# Altium PCB carrier_board.PcbDoc (part 2 of 18)
Units mm, origin at the board's own origin, x right, y up, seen from the top; angles counter-clockwise.
Board outline 146 x 102 mm, 20 copper layers (F.Cu, F.Mask, B.Cu, B.Mask, In1.Cu, F.SilkS, In2.Cu, B.SilkS, F.Adhes, B.Adhes, F.Paste, B.Paste, Dwgs.User, Cmts.User, Eco1.User, Eco2.User, Edge.Cuts, Margin, B.CrtYd, F.CrtYd); 256 components, 384 nets, 1262 pads, 1024 vias.
Unrouted connection lines stored in the file: 117.
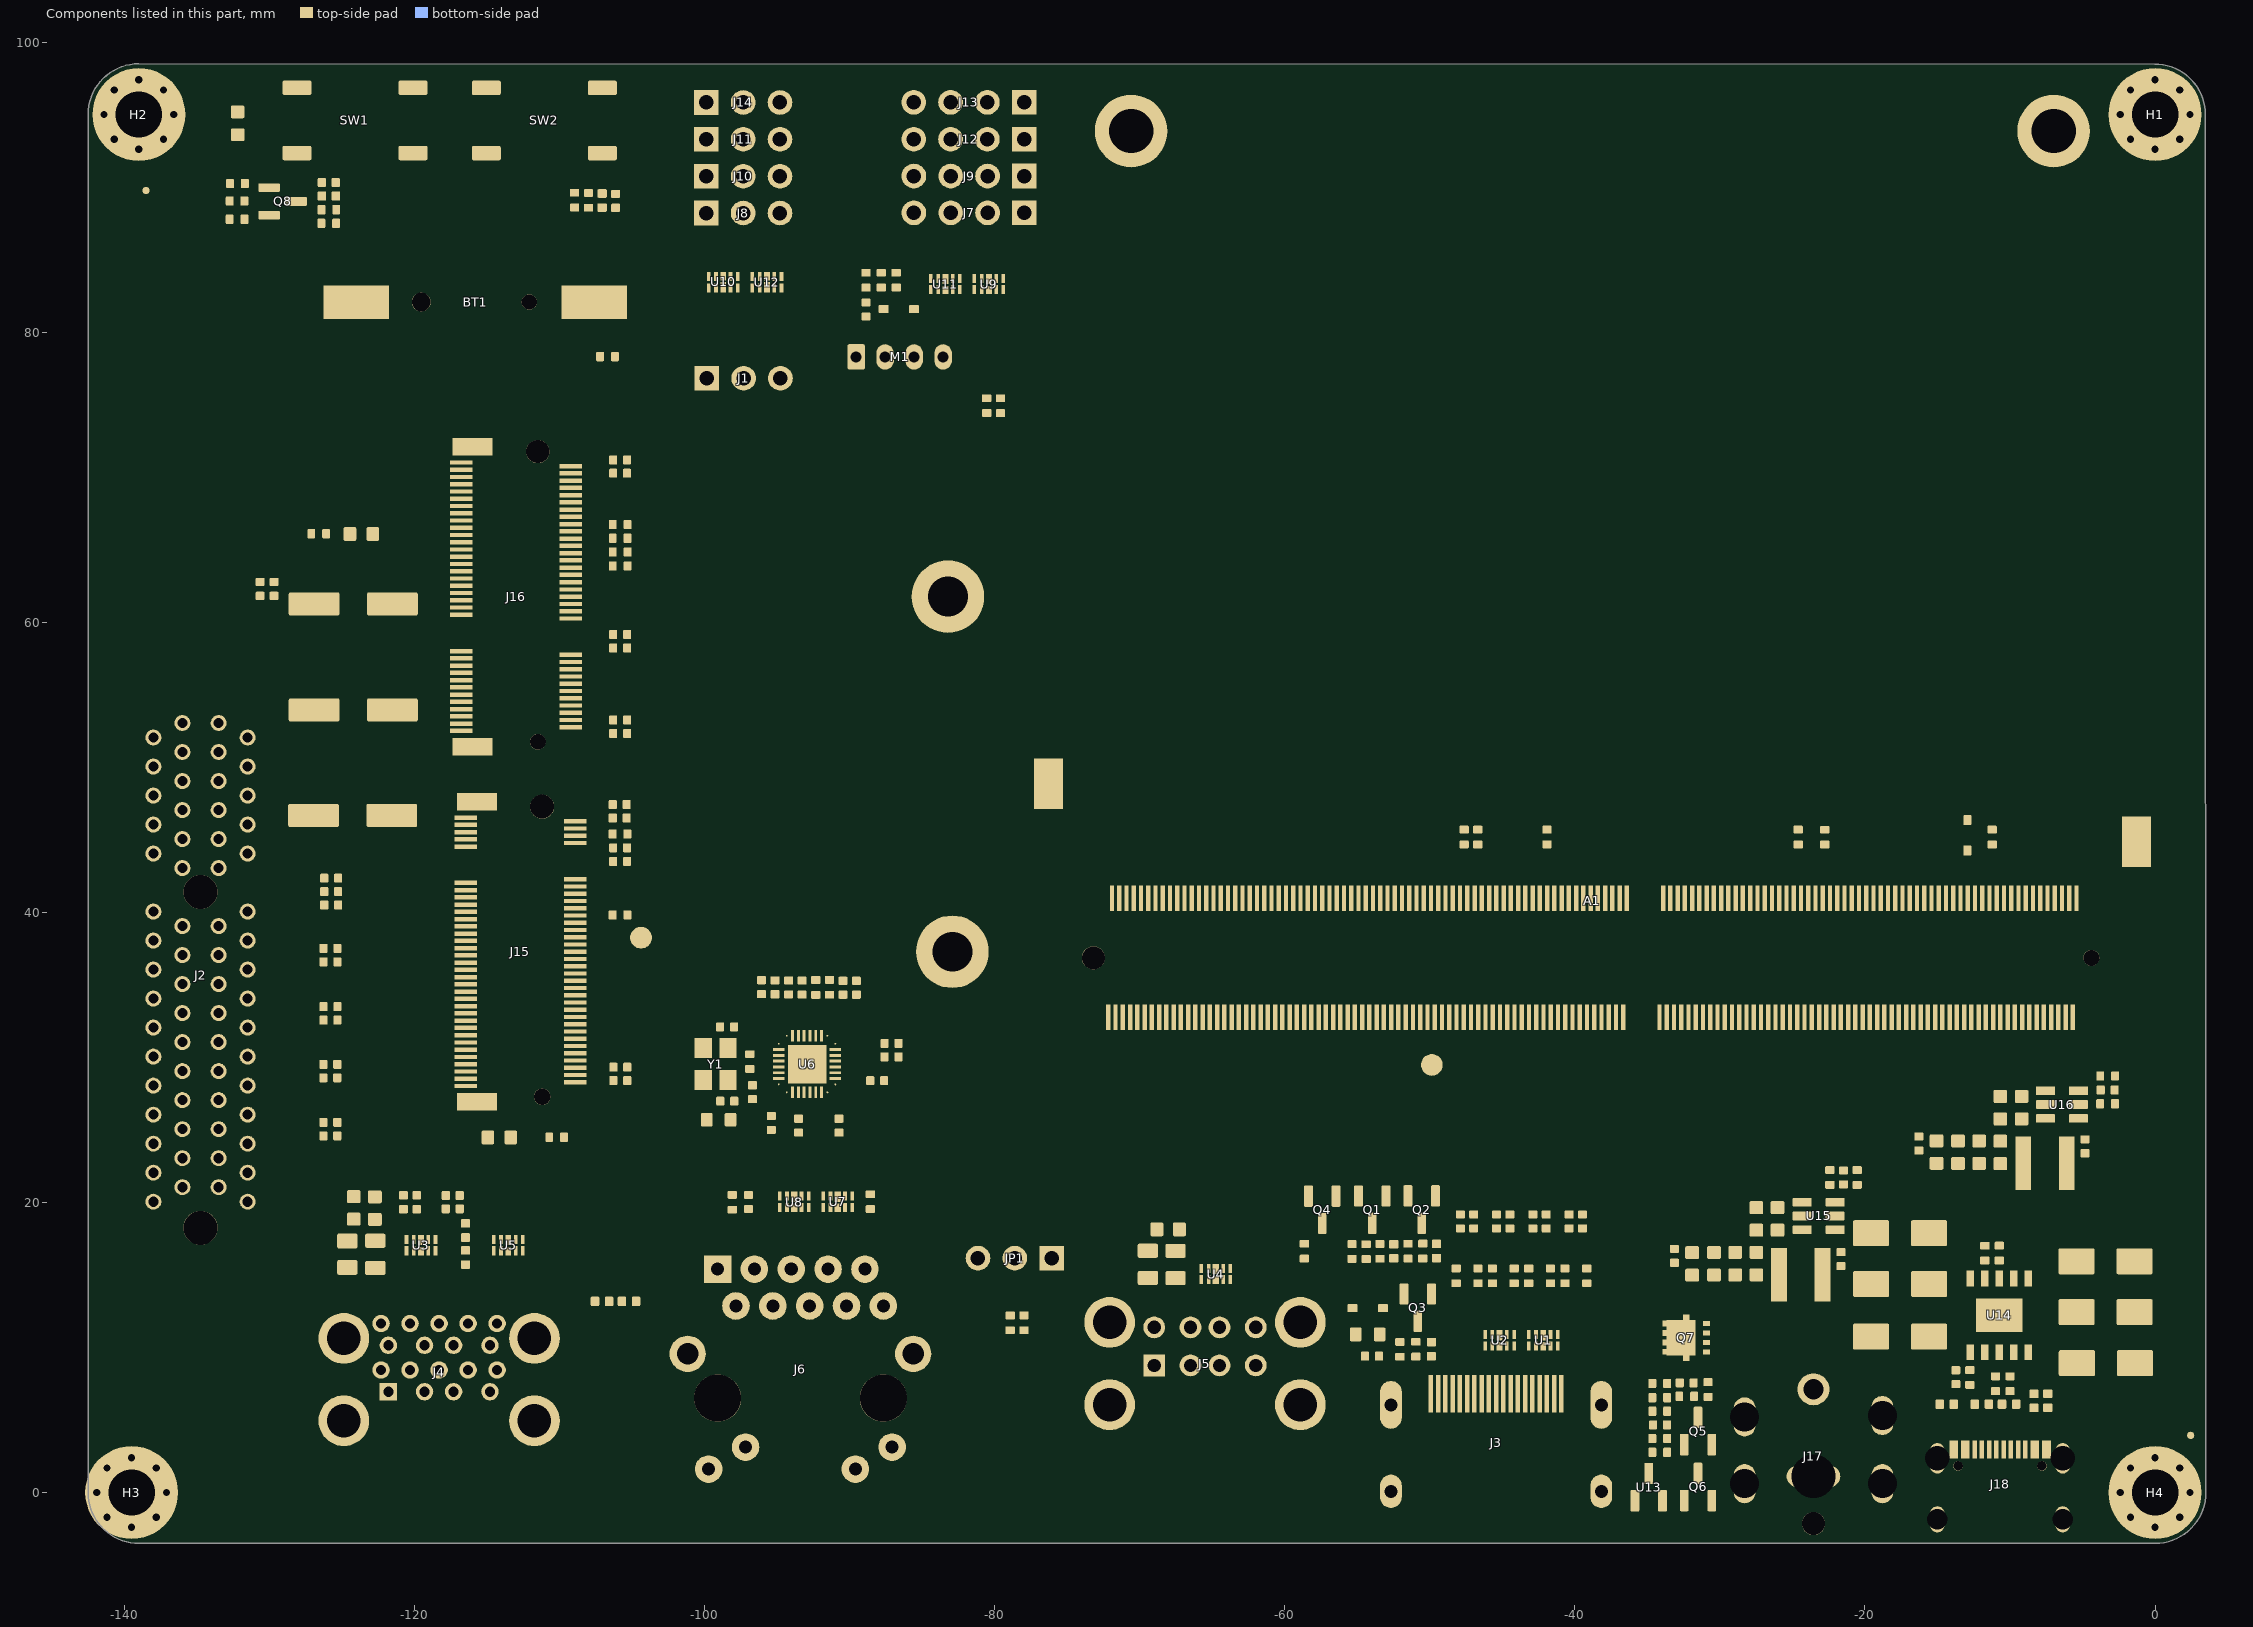
[diagram p13: the components of this part, seen from the top]

## Design rules (kind name [scope] priority, off if disabled: settings) (continued)
PolygonConnect Polygon_B.Cu-Net-(JP1-C)_ConnectDirect [IsNamedPolygon('B.Cu-Net-(JP1-C)')] p199: connectstyle=Direct reliefconductorwidth=0.254 reliefentries=4 polygonreliefangle="90 Angle" airgapwidth=0.254
PolygonConnect "Polygon_B.Cu-/LattePanda Module/HSIO_11_RX-_ConnectDirect" [IsNamedPolygon('B.Cu-/LattePanda Module/HSIO_11_RX-')] p200: connectstyle=Direct reliefconductorwidth=0.254 reliefentries=4 polygonreliefangle="90 Angle" airgapwidth=0.254
PolygonConnect "Polygon_B.Cu-/LattePanda Module/HSIO_2_RX+_ConnectDirect" [IsNamedPolygon('B.Cu-/LattePanda Module/HSIO_2_RX+')] p201: connectstyle=Direct reliefconductorwidth=0.254 reliefentries=4 polygonreliefangle="90 Angle" airgapwidth=0.254
PolygonConnect Polygon_B.Cu-/USB2.0&USB3.0/CON_USB3_D_P-1_ConnectDirect [IsNamedPolygon('B.Cu-/USB2.0&USB3.0/CON_USB3_D_P-1')] p202: connectstyle=Direct reliefconductorwidth=0.254 reliefentries=4 polygonreliefangle="90 Angle" airgapwidth=0.254
PolygonConnect "Polygon_B.Cu-/Gigabit Ethernet/GbE_PCIe_RX+_ConnectDirect" [IsNamedPolygon('B.Cu-/Gigabit Ethernet/GbE_PCIe_RX+')] p203: connectstyle=Direct reliefconductorwidth=0.254 reliefentries=4 polygonreliefangle="90 Angle" airgapwidth=0.254
PolygonConnect Polygon_B.Cu-Net-(Q7-G)_ConnectDirect [IsNamedPolygon('B.Cu-Net-(Q7-G)')] p204: connectstyle=Direct reliefconductorwidth=0.254 reliefentries=4 polygonreliefangle="90 Angle" airgapwidth=0.254
PolygonConnect Polygon_B.Cu-+15V-4_ConnectDirect [IsNamedPolygon('B.Cu-+15V-4')] p205: connectstyle=Direct reliefconductorwidth=0.254 reliefentries=4 polygonreliefangle="90 Angle" airgapwidth=0.254
PolygonConnect "Polygon_B.Cu-/LattePanda Module/HSIO_8_RX+_ConnectDirect" [IsNamedPolygon('B.Cu-/LattePanda Module/HSIO_8_RX+')] p206: connectstyle=Direct reliefconductorwidth=0.254 reliefentries=4 polygonreliefangle="90 Angle" airgapwidth=0.254
PolygonConnect "Polygon_B.Cu-/M.2 E&M Key/~{CLKREQE}-1_ConnectDirect" [IsNamedPolygon('B.Cu-/M.2 E&M Key/~{CLKREQE}-1')] p207: connectstyle=Direct reliefconductorwidth=0.254 reliefentries=4 polygonreliefangle="90 Angle" airgapwidth=0.254
PolygonConnect Polygon_B.Cu-/PSU/CC1_ConnectDirect [IsNamedPolygon('B.Cu-/PSU/CC1')] p208: connectstyle=Direct reliefconductorwidth=0.254 reliefentries=4 polygonreliefangle="90 Angle" airgapwidth=0.254
PolygonConnect "Polygon_B.Cu-/LattePanda Module/HSIO_9_TX+_ConnectDirect" [IsNamedPolygon('B.Cu-/LattePanda Module/HSIO_9_TX+')] p209: connectstyle=Direct reliefconductorwidth=0.254 reliefentries=4 polygonreliefangle="90 Angle" airgapwidth=0.254
PolygonConnect "Polygon_B.Cu-/LattePanda Module/HSIO_8_RX--1_ConnectDirect" [IsNamedPolygon('B.Cu-/LattePanda Module/HSIO_8_RX--1')] p210: connectstyle=Direct reliefconductorwidth=0.254 reliefentries=4 polygonreliefangle="90 Angle" airgapwidth=0.254
PolygonConnect Polygon_B.Cu-/USB2.0&USB3.0/CON_USB4_D_N_ConnectDirect [IsNamedPolygon('B.Cu-/USB2.0&USB3.0/CON_USB4_D_N')] p211: connectstyle=Direct reliefconductorwidth=0.254 reliefentries=4 polygonreliefangle="90 Angle" airgapwidth=0.254
PolygonConnect "Polygon_B.Cu-/LattePanda Module/USB_2_P7+_ConnectDirect" [IsNamedPolygon('B.Cu-/LattePanda Module/USB_2_P7+')] p212: connectstyle=Direct reliefconductorwidth=0.254 reliefentries=4 polygonreliefangle="90 Angle" airgapwidth=0.254
PolygonConnect Polygon_B.Cu-/USB2.0&USB3.0/CON_USB3_D_P_ConnectDirect [IsNamedPolygon('B.Cu-/USB2.0&USB3.0/CON_USB3_D_P')] p213: connectstyle=Direct reliefconductorwidth=0.254 reliefentries=4 polygonreliefangle="90 Angle" airgapwidth=0.254
PolygonConnect Polygon_B.Cu-VPullup_ConnectDirect [IsNamedPolygon('B.Cu-VPullup')] p214: connectstyle=Direct reliefconductorwidth=0.254 reliefentries=4 polygonreliefangle="90 Angle" airgapwidth=0.254
PolygonConnect Polygon_B.Cu-+15V-3_ConnectDirect [IsNamedPolygon('B.Cu-+15V-3')] p215: connectstyle=Direct reliefconductorwidth=0.254 reliefentries=4 polygonreliefangle="90 Angle" airgapwidth=0.254
PolygonConnect Polygon_B.Cu-+3V3-4_ConnectDirect [IsNamedPolygon('B.Cu-+3V3-4')] p216: connectstyle=Direct reliefconductorwidth=0.254 reliefentries=4 polygonreliefangle="90 Angle" airgapwidth=0.254
PolygonConnect "Polygon_B.Cu-/LattePanda Module/HSIO_8_TX+_ConnectDirect" [IsNamedPolygon('B.Cu-/LattePanda Module/HSIO_8_TX+')] p217: connectstyle=Direct reliefconductorwidth=0.254 reliefentries=4 polygonreliefangle="90 Angle" airgapwidth=0.254
PolygonConnect "Polygon_B.Cu-/Gigabit Ethernet/GbE_PCIe_CLK-_ConnectDirect" [IsNamedPolygon('B.Cu-/Gigabit Ethernet/GbE_PCIe_CLK-')] p218: connectstyle=Direct reliefconductorwidth=0.254 reliefentries=4 polygonreliefangle="90 Angle" airgapwidth=0.254
PolygonConnect Polygon_B.Cu-+15V-2_ConnectDirect [IsNamedPolygon('B.Cu-+15V-2')] p219: connectstyle=Direct reliefconductorwidth=0.254 reliefentries=4 polygonreliefangle="90 Angle" airgapwidth=0.254
PolygonConnect Polygon_B.Cu-/USB2.0&USB3.0/CON_USB3_SSRX_N_ConnectDirect [IsNamedPolygon('B.Cu-/USB2.0&USB3.0/CON_USB3_SSRX_N')] p220: connectstyle=Direct reliefconductorwidth=0.254 reliefentries=4 polygonreliefangle="90 Angle" airgapwidth=0.254
PolygonConnect Polygon_B.Cu-+15V-1_ConnectDirect [IsNamedPolygon('B.Cu-+15V-1')] p221: connectstyle=Direct reliefconductorwidth=0.254 reliefentries=4 polygonreliefangle="90 Angle" airgapwidth=0.254
PolygonConnect Polygon_B.Cu-/USB2.0&USB3.0/CON_USB3_D_N_ConnectDirect [IsNamedPolygon('B.Cu-/USB2.0&USB3.0/CON_USB3_D_N')] p222: connectstyle=Direct reliefconductorwidth=0.254 reliefentries=4 polygonreliefangle="90 Angle" airgapwidth=0.254
PolygonConnect "Polygon_B.Cu-/LattePanda Module/REFCLK2-_ConnectDirect" [IsNamedPolygon('B.Cu-/LattePanda Module/REFCLK2-')] p223: connectstyle=Direct reliefconductorwidth=0.254 reliefentries=4 polygonreliefangle="90 Angle" airgapwidth=0.254
PolygonConnect "Polygon_B.Cu-/LattePanda Module/HSIO_10_RX+_ConnectDirect" [IsNamedPolygon('B.Cu-/LattePanda Module/HSIO_10_RX+')] p224: connectstyle=Direct reliefconductorwidth=0.254 reliefentries=4 polygonreliefangle="90 Angle" airgapwidth=0.254
PolygonConnect "Polygon_B.Cu-/LattePanda Module/HSIO_11_TX+_ConnectDirect" [IsNamedPolygon('B.Cu-/LattePanda Module/HSIO_11_TX+')] p225: connectstyle=Direct reliefconductorwidth=0.254 reliefentries=4 polygonreliefangle="90 Angle" airgapwidth=0.254
PolygonConnect "Polygon_B.Cu-/Gigabit Ethernet/GbE_PCIe_CLK+_ConnectDirect" [IsNamedPolygon('B.Cu-/Gigabit Ethernet/GbE_PCIe_CLK+')] p226: connectstyle=Direct reliefconductorwidth=0.254 reliefentries=4 polygonreliefangle="90 Angle" airgapwidth=0.254
PolygonConnect Polygon_B.Cu-Net-(A1-SIO_UART_TX)_ConnectDirect [IsNamedPolygon('B.Cu-Net-(A1-SIO_UART_TX)')] p227: connectstyle=Direct reliefconductorwidth=0.254 reliefentries=4 polygonreliefangle="90 Angle" airgapwidth=0.254
PolygonConnect Polygon_B.Cu-+12V-1_ConnectDirect [IsNamedPolygon('B.Cu-+12V-1')] p228: connectstyle=Direct reliefconductorwidth=0.254 reliefentries=4 polygonreliefangle="90 Angle" airgapwidth=0.254
PolygonConnect Polygon_B.Cu-+15V_ConnectDirect [IsNamedPolygon('B.Cu-+15V')] p229: connectstyle=Direct reliefconductorwidth=0.254 reliefentries=4 polygonreliefangle="90 Angle" airgapwidth=0.254
PolygonConnect Polygon_B.Cu-+3V3-3_ConnectDirect [IsNamedPolygon('B.Cu-+3V3-3')] p230: connectstyle=Direct reliefconductorwidth=0.254 reliefentries=4 polygonreliefangle="90 Angle" airgapwidth=0.254
PolygonConnect Polygon_B.Cu-+3V3-2_ConnectDirect [IsNamedPolygon('B.Cu-+3V3-2')] p231: connectstyle=Direct reliefconductorwidth=0.254 reliefentries=4 polygonreliefangle="90 Angle" airgapwidth=0.254
PolygonConnect Polygon_B.Cu-+12V_ConnectDirect [IsNamedPolygon('B.Cu-+12V')] p232: connectstyle=Direct reliefconductorwidth=0.254 reliefentries=4 polygonreliefangle="90 Angle" airgapwidth=0.254
PolygonConnect Polygon_B.Cu-+BATT_ConnectDirect [IsNamedPolygon('B.Cu-+BATT')] p233: connectstyle=Direct reliefconductorwidth=0.254 reliefentries=4 polygonreliefangle="90 Angle" airgapwidth=0.254
PolygonConnect "Polygon_B.Cu-/LattePanda Module/HSIO_2_TX+_ConnectDirect" [IsNamedPolygon('B.Cu-/LattePanda Module/HSIO_2_TX+')] p234: connectstyle=Direct reliefconductorwidth=0.254 reliefentries=4 polygonreliefangle="90 Angle" airgapwidth=0.254
PolygonConnect "Polygon_B.Cu-/LattePanda Module/HSIO_3_TX+_ConnectDirect" [IsNamedPolygon('B.Cu-/LattePanda Module/HSIO_3_TX+')] p235: connectstyle=Direct reliefconductorwidth=0.254 reliefentries=4 polygonreliefangle="90 Angle" airgapwidth=0.254
PolygonConnect Polygon_B.Cu-+3V3-1_ConnectDirect [IsNamedPolygon('B.Cu-+3V3-1')] p236: connectstyle=Direct reliefconductorwidth=0.254 reliefentries=4 polygonreliefangle="90 Angle" airgapwidth=0.254
PolygonConnect Polygon_B.Cu-+3V3_ConnectDirect [IsNamedPolygon('B.Cu-+3V3')] p237: connectstyle=Direct reliefconductorwidth=0.254 reliefentries=4 polygonreliefangle="90 Angle" airgapwidth=0.254
PolygonConnect "Polygon_B.Cu-/LattePanda Module/HSIO_10_TX-_ConnectDirect" [IsNamedPolygon('B.Cu-/LattePanda Module/HSIO_10_TX-')] p238: connectstyle=Direct reliefconductorwidth=0.254 reliefentries=4 polygonreliefangle="90 Angle" airgapwidth=0.254
PolygonConnect Polygon_B.Cu-/GPIO/I2C2_SCL_ConnectDirect [IsNamedPolygon('B.Cu-/GPIO/I2C2_SCL')] p239: connectstyle=Direct reliefconductorwidth=0.254 reliefentries=4 polygonreliefangle="90 Angle" airgapwidth=0.254
PolygonConnect Polygon_B.Cu-/HDMI/DDI_B_HPD_ConnectDirect [IsNamedPolygon('B.Cu-/HDMI/DDI_B_HPD')] p240: connectstyle=Direct reliefconductorwidth=0.254 reliefentries=4 polygonreliefangle="90 Angle" airgapwidth=0.254
PolygonConnect Polygon_B.Cu-Net-(A1-~{BIOS_SEL})-1_ConnectDirect [IsNamedPolygon('B.Cu-Net-(A1-~{BIOS_SEL})-1')] p241: connectstyle=Direct reliefconductorwidth=0.254 reliefentries=4 polygonreliefangle="90 Angle" airgapwidth=0.254
PolygonConnect "Polygon_B.Cu-/LattePanda Module/HSIO_8_RX-_ConnectDirect" [IsNamedPolygon('B.Cu-/LattePanda Module/HSIO_8_RX-')] p242: connectstyle=Direct reliefconductorwidth=0.254 reliefentries=4 polygonreliefangle="90 Angle" airgapwidth=0.254
PolygonConnect "Polygon_B.Cu-/M.2 E&M Key/~{CLKREQE}_ConnectDirect" [IsNamedPolygon('B.Cu-/M.2 E&M Key/~{CLKREQE}')] p243: connectstyle=Direct reliefconductorwidth=0.254 reliefentries=4 polygonreliefangle="90 Angle" airgapwidth=0.254
PolygonConnect Polygon_B.Cu-/GPIO/I2C3_SCL_ConnectDirect [IsNamedPolygon('B.Cu-/GPIO/I2C3_SCL')] p244: connectstyle=Direct reliefconductorwidth=0.254 reliefentries=4 polygonreliefangle="90 Angle" airgapwidth=0.254
PolygonConnect Polygon_B.Cu-Net-(A1-~{BIOS_SEL})_ConnectDirect [IsNamedPolygon('B.Cu-Net-(A1-~{BIOS_SEL})')] p245: connectstyle=Direct reliefconductorwidth=0.254 reliefentries=4 polygonreliefangle="90 Angle" airgapwidth=0.254
PolygonConnect "Polygon_B.Cu-/LattePanda Module/HSIO_9_TX-_ConnectDirect" [IsNamedPolygon('B.Cu-/LattePanda Module/HSIO_9_TX-')] p246: connectstyle=Direct reliefconductorwidth=0.254 reliefentries=4 polygonreliefangle="90 Angle" airgapwidth=0.254
PolygonConnect Polygon_B.Cu-/PSU/CC2_ConnectDirect [IsNamedPolygon('B.Cu-/PSU/CC2')] p247: connectstyle=Direct reliefconductorwidth=0.254 reliefentries=4 polygonreliefangle="90 Angle" airgapwidth=0.254
PolygonConnect Polygon_In2.Cu-+3V3-1_ConnectDirect [IsNamedPolygon('In2.Cu-+3V3-1')] p248: connectstyle=Direct reliefconductorwidth=0.254 reliefentries=4 polygonreliefangle="90 Angle" airgapwidth=0.254
PolygonConnect Polygon_F.Cu-+3V3-79_ConnectDirect [IsNamedPolygon('F.Cu-+3V3-79')] p249: connectstyle=Direct reliefconductorwidth=0.254 reliefentries=4 polygonreliefangle="90 Angle" airgapwidth=0.254
PolygonConnect Polygon_In2.Cu-+3V3_ConnectDirect [IsNamedPolygon('In2.Cu-+3V3')] p250: connectstyle=Direct reliefconductorwidth=0.254 reliefentries=4 polygonreliefangle="90 Angle" airgapwidth=0.254
PolygonConnect Polygon_F.Cu-+3V3-78_ConnectDirect [IsNamedPolygon('F.Cu-+3V3-78')] p251: connectstyle=Direct reliefconductorwidth=0.254 reliefentries=4 polygonreliefangle="90 Angle" airgapwidth=0.254
PolygonConnect Polygon_B.Cu-+12VA_ConnectDirect [IsNamedPolygon('B.Cu-+12VA')] p252: connectstyle=Direct reliefconductorwidth=0.254 reliefentries=4 polygonreliefangle="90 Angle" airgapwidth=0.254
PolygonConnect Polygon_F.Cu-+12VA-2_ConnectDirect [IsNamedPolygon('F.Cu-+12VA-2')] p253: connectstyle=Direct reliefconductorwidth=0.254 reliefentries=4 polygonreliefangle="90 Angle" airgapwidth=0.254
PolygonConnect Polygon_B.Cu-GND-1_ConnectDirect [IsNamedPolygon('B.Cu-GND-1') vs IsVia or IsSMTPin] p254: connectstyle=Direct reliefconductorwidth=0.254 reliefentries=4 polygonreliefangle="90 Angle" airgapwidth=0.254
PolygonConnect Polygon_B.Cu-GND-1_ConnectRelief45 [IsNamedPolygon('B.Cu-GND-1') vs IsThruPin and (PadShape_AllLayers = 'Round')] p255: connectstyle=Relief reliefconductorwidth=0.3 reliefentries=4 polygonreliefangle="45 Angle" airgapwidth=0.3
PolygonConnect Polygon_B.Cu-GND-1_ConnectRelief90 [IsNamedPolygon('B.Cu-GND-1') vs IsThruPin and (PadShape_AllLayers <> 'Round')] p256: connectstyle=Relief reliefconductorwidth=0.3 reliefentries=4 polygonreliefangle="90 Angle" airgapwidth=0.3
PolygonConnect Polygon_F.Cu-GND-192_ConnectDirect [IsNamedPolygon('F.Cu-GND-192') vs IsVia or IsSMTPin] p257: connectstyle=Direct reliefconductorwidth=0.254 reliefentries=4 polygonreliefangle="90 Angle" airgapwidth=0.254
PolygonConnect Polygon_F.Cu-GND-192_ConnectRelief45 [IsNamedPolygon('F.Cu-GND-192') vs IsThruPin and (PadShape_AllLayers = 'Round')] p258: connectstyle=Relief reliefconductorwidth=0.3 reliefentries=4 polygonreliefangle="45 Angle" airgapwidth=0.3
PolygonConnect Polygon_F.Cu-GND-192_ConnectRelief90 [IsNamedPolygon('F.Cu-GND-192') vs IsThruPin and (PadShape_AllLayers <> 'Round')] p259: connectstyle=Relief reliefconductorwidth=0.3 reliefentries=4 polygonreliefangle="90 Angle" airgapwidth=0.3
PolygonConnect Polygon_B.Cu-+5V_ConnectDirect [IsNamedPolygon('B.Cu-+5V')] p260: connectstyle=Direct reliefconductorwidth=0.254 reliefentries=4 polygonreliefangle="90 Angle" airgapwidth=0.254
PolygonConnect Polygon_F.Cu-+5V-13_ConnectDirect [IsNamedPolygon('F.Cu-+5V-13')] p261: connectstyle=Direct reliefconductorwidth=0.254 reliefentries=4 polygonreliefangle="90 Angle" airgapwidth=0.254
PolygonConnect Polygon_B.Cu-GND_ConnectDirect [IsNamedPolygon('B.Cu-GND') vs IsVia or IsSMTPin] p262: connectstyle=Direct reliefconductorwidth=0.254 reliefentries=4 polygonreliefangle="90 Angle" airgapwidth=0.254
PolygonConnect Polygon_B.Cu-GND_ConnectRelief45 [IsNamedPolygon('B.Cu-GND') vs IsThruPin and (PadShape_AllLayers = 'Round')] p263: connectstyle=Relief reliefconductorwidth=0.5 reliefentries=4 polygonreliefangle="45 Angle" airgapwidth=0.5
PolygonConnect Polygon_B.Cu-GND_ConnectRelief90 [IsNamedPolygon('B.Cu-GND') vs IsThruPin and (PadShape_AllLayers <> 'Round')] p264: connectstyle=Relief reliefconductorwidth=0.5 reliefentries=4 polygonreliefangle="90 Angle" airgapwidth=0.5
PolygonConnect Polygon_F.Cu-GND-191_ConnectDirect [IsNamedPolygon('F.Cu-GND-191') vs IsVia or IsSMTPin] p265: connectstyle=Direct reliefconductorwidth=0.254 reliefentries=4 polygonreliefangle="90 Angle" airgapwidth=0.254
PolygonConnect Polygon_F.Cu-GND-191_ConnectRelief45 [IsNamedPolygon('F.Cu-GND-191') vs IsThruPin and (PadShape_AllLayers = 'Round')] p266: connectstyle=Relief reliefconductorwidth=0.5 reliefentries=4 polygonreliefangle="45 Angle" airgapwidth=0.5
PolygonConnect Polygon_F.Cu-GND-191_ConnectRelief90 [IsNamedPolygon('F.Cu-GND-191') vs IsThruPin and (PadShape_AllLayers <> 'Round')] p267: connectstyle=Relief reliefconductorwidth=0.5 reliefentries=4 polygonreliefangle="90 Angle" airgapwidth=0.5
PolygonConnect Polygon_F.Cu-/USB2.0&USB3.0/CON_USB1_D_N-4_ConnectDirect [IsNamedPolygon('F.Cu-/USB2.0&USB3.0/CON_USB1_D_N-4')] p268: connectstyle=Direct reliefconductorwidth=0.254 reliefentries=4 polygonreliefangle="90 Angle" airgapwidth=0.254
PolygonConnect Polygon_F.Cu-GND-190_ConnectDirect [IsNamedPolygon('F.Cu-GND-190')] p269: connectstyle=Direct reliefconductorwidth=0.254 reliefentries=4 polygonreliefangle="90 Angle" airgapwidth=0.254
PolygonConnect "Polygon_F.Cu-/LattePanda Module/HSIO_11_TX+-1_ConnectDirect" [IsNamedPolygon('F.Cu-/LattePanda Module/HSIO_11_TX+-1')] p270: connectstyle=Direct reliefconductorwidth=0.254 reliefentries=4 polygonreliefangle="90 Angle" airgapwidth=0.254
PolygonConnect "Polygon_F.Cu-/LattePanda Module/USB_2_P7+-2_ConnectDirect" [IsNamedPolygon('F.Cu-/LattePanda Module/USB_2_P7+-2')] p271: connectstyle=Direct reliefconductorwidth=0.254 reliefentries=4 polygonreliefangle="90 Angle" airgapwidth=0.254
PolygonConnect Polygon_F.Cu-Net-(U15-BOOST)-1_ConnectDirect [IsNamedPolygon('F.Cu-Net-(U15-BOOST)-1')] p272: connectstyle=Direct reliefconductorwidth=0.254 reliefentries=4 polygonreliefangle="90 Angle" airgapwidth=0.254
PolygonConnect Polygon_F.Cu-/GPIO/I2C4_SCL-4_ConnectDirect [IsNamedPolygon('F.Cu-/GPIO/I2C4_SCL-4')] p273: connectstyle=Direct reliefconductorwidth=0.254 reliefentries=4 polygonreliefangle="90 Angle" airgapwidth=0.254
PolygonConnect Polygon_F.Cu-Net-(D21-A2)-4_ConnectDirect [IsNamedPolygon('F.Cu-Net-(D21-A2)-4')] p274: connectstyle=Direct reliefconductorwidth=0.254 reliefentries=4 polygonreliefangle="90 Angle" airgapwidth=0.254
PolygonConnect Polygon_F.Cu-/Fan_Temp/FAN_1_PWM-2_ConnectDirect [IsNamedPolygon('F.Cu-/Fan_Temp/FAN_1_PWM-2')] p275: connectstyle=Direct reliefconductorwidth=0.254 reliefentries=4 polygonreliefangle="90 Angle" airgapwidth=0.254
PolygonConnect "Polygon_F.Cu-/Gigabit Ethernet/HSO+_ConnectDirect" [IsNamedPolygon('F.Cu-/Gigabit Ethernet/HSO+')] p276: connectstyle=Direct reliefconductorwidth=0.254 reliefentries=4 polygonreliefangle="90 Angle" airgapwidth=0.254
PolygonConnect Polygon_F.Cu-Net-(D26-A)-5_ConnectDirect [IsNamedPolygon('F.Cu-Net-(D26-A)-5')] p277: connectstyle=Direct reliefconductorwidth=0.254 reliefentries=4 polygonreliefangle="90 Angle" airgapwidth=0.254
PolygonConnect Polygon_F.Cu-/HDMI/DDC_SDA-3_ConnectDirect [IsNamedPolygon('F.Cu-/HDMI/DDC_SDA-3')] p278: connectstyle=Direct reliefconductorwidth=0.254 reliefentries=4 polygonreliefangle="90 Angle" airgapwidth=0.254
PolygonConnect Polygon_F.Cu-/GPIO/SOC_UART2_TX-4_ConnectDirect [IsNamedPolygon('F.Cu-/GPIO/SOC_UART2_TX-4')] p279: connectstyle=Direct reliefconductorwidth=0.254 reliefentries=4 polygonreliefangle="90 Angle" airgapwidth=0.254
PolygonConnect Polygon_F.Cu-Net-(Q5-G)-3_ConnectDirect [IsNamedPolygon('F.Cu-Net-(Q5-G)-3')] p280: connectstyle=Direct reliefconductorwidth=0.254 reliefentries=4 polygonreliefangle="90 Angle" airgapwidth=0.254
PolygonConnect Polygon_F.Cu-/USB2.0&USB3.0/CON_USB2_D_P-4_ConnectDirect [IsNamedPolygon('F.Cu-/USB2.0&USB3.0/CON_USB2_D_P-4')] p281: connectstyle=Direct reliefconductorwidth=0.254 reliefentries=4 polygonreliefangle="90 Angle" airgapwidth=0.254
PolygonConnect Polygon_F.Cu-/GPIO/I2C3_SCL-6_ConnectDirect [IsNamedPolygon('F.Cu-/GPIO/I2C3_SCL-6')] p282: connectstyle=Direct reliefconductorwidth=0.254 reliefentries=4 polygonreliefangle="90 Angle" airgapwidth=0.254
PolygonConnect Polygon_F.Cu-/HDMI/DDC_SCL-6_ConnectDirect [IsNamedPolygon('F.Cu-/HDMI/DDC_SCL-6')] p283: connectstyle=Direct reliefconductorwidth=0.254 reliefentries=4 polygonreliefangle="90 Angle" airgapwidth=0.254
PolygonConnect Polygon_F.Cu-+15V-5_ConnectDirect [IsNamedPolygon('F.Cu-+15V-5')] p284: connectstyle=Direct reliefconductorwidth=0.254 reliefentries=4 polygonreliefangle="90 Angle" airgapwidth=0.254
PolygonConnect Polygon_F.Cu-+15V-4_ConnectDirect [IsNamedPolygon('F.Cu-+15V-4')] p285: connectstyle=Direct reliefconductorwidth=0.254 reliefentries=4 polygonreliefangle="90 Angle" airgapwidth=0.254
PolygonConnect Polygon_F.Cu-GND-189_ConnectDirect [IsNamedPolygon('F.Cu-GND-189')] p286: connectstyle=Direct reliefconductorwidth=0.254 reliefentries=4 polygonreliefangle="90 Angle" airgapwidth=0.254
PolygonConnect Polygon_F.Cu-Net-(D9-K)-1_ConnectDirect [IsNamedPolygon('F.Cu-Net-(D9-K)-1')] p287: connectstyle=Direct reliefconductorwidth=0.254 reliefentries=4 polygonreliefangle="90 Angle" airgapwidth=0.254
PolygonConnect Polygon_F.Cu-/HDMI/DDC_SDA-2_ConnectDirect [IsNamedPolygon('F.Cu-/HDMI/DDC_SDA-2')] p288: connectstyle=Direct reliefconductorwidth=0.254 reliefentries=4 polygonreliefangle="90 Angle" airgapwidth=0.254
PolygonConnect Polygon_F.Cu-GND-188_ConnectDirect [IsNamedPolygon('F.Cu-GND-188')] p289: connectstyle=Direct reliefconductorwidth=0.254 reliefentries=4 polygonreliefangle="90 Angle" airgapwidth=0.254
PolygonConnect Polygon_F.Cu-GND-187_ConnectDirect [IsNamedPolygon('F.Cu-GND-187')] p290: connectstyle=Direct reliefconductorwidth=0.254 reliefentries=4 polygonreliefangle="90 Angle" airgapwidth=0.254
PolygonConnect Polygon_F.Cu-/HDMI/TMDS_CK+-7_ConnectDirect [IsNamedPolygon('F.Cu-/HDMI/TMDS_CK+-7')] p291: connectstyle=Direct reliefconductorwidth=0.254 reliefentries=4 polygonreliefangle="90 Angle" airgapwidth=0.254
PolygonConnect Polygon_F.Cu-/USB2.0&USB3.0/CON_USB4_SSTX_N-5_ConnectDirect [IsNamedPolygon('F.Cu-/USB2.0&USB3.0/CON_USB4_SSTX_N-5')] p292: connectstyle=Direct reliefconductorwidth=0.254 reliefentries=4 polygonreliefangle="90 Angle" airgapwidth=0.254
PolygonConnect Polygon_F.Cu-GND-186_ConnectDirect [IsNamedPolygon('F.Cu-GND-186')] p293: connectstyle=Direct reliefconductorwidth=0.254 reliefentries=4 polygonreliefangle="90 Angle" airgapwidth=0.254
PolygonConnect Polygon_F.Cu-Net-(U6-CKXTAL1)-5_ConnectDirect [IsNamedPolygon('F.Cu-Net-(U6-CKXTAL1)-5')] p294: connectstyle=Direct reliefconductorwidth=0.254 reliefentries=4 polygonreliefangle="90 Angle" airgapwidth=0.254
PolygonConnect Polygon_F.Cu-/GPIO/I2C5_SCL-4_ConnectDirect [IsNamedPolygon('F.Cu-/GPIO/I2C5_SCL-4')] p295: connectstyle=Direct reliefconductorwidth=0.254 reliefentries=4 polygonreliefangle="90 Angle" airgapwidth=0.254
PolygonConnect Polygon_F.Cu-/GPIO/SOC_UART0_TX-4_ConnectDirect [IsNamedPolygon('F.Cu-/GPIO/SOC_UART0_TX-4')] p296: connectstyle=Direct reliefconductorwidth=0.254 reliefentries=4 polygonreliefangle="90 Angle" airgapwidth=0.254
PolygonConnect Polygon_F.Cu-/USB2.0&USB3.0/CON_USB1_D_N-3_ConnectDirect [IsNamedPolygon('F.Cu-/USB2.0&USB3.0/CON_USB1_D_N-3')] p297: connectstyle=Direct reliefconductorwidth=0.254 reliefentries=4 polygonreliefangle="90 Angle" airgapwidth=0.254
PolygonConnect "Polygon_F.Cu-/LattePanda Module/HSIO_3_TX+-2_ConnectDirect" [IsNamedPolygon('F.Cu-/LattePanda Module/HSIO_3_TX+-2')] p298: connectstyle=Direct reliefconductorwidth=0.254 reliefentries=4 polygonreliefangle="90 Angle" airgapwidth=0.254
PolygonConnect Polygon_F.Cu-GND-185_ConnectDirect [IsNamedPolygon('F.Cu-GND-185')] p299: connectstyle=Direct reliefconductorwidth=0.254 reliefentries=4 polygonreliefangle="90 Angle" airgapwidth=0.254
PolygonConnect Polygon_F.Cu-/HDMI/TMDS_D2+-7_ConnectDirect [IsNamedPolygon('F.Cu-/HDMI/TMDS_D2+-7')] p300: connectstyle=Direct reliefconductorwidth=0.254 reliefentries=4 polygonreliefangle="90 Angle" airgapwidth=0.254
PolygonConnect Polygon_F.Cu-Net-(D11-A2)-3_ConnectDirect [IsNamedPolygon('F.Cu-Net-(D11-A2)-3')] p301: connectstyle=Direct reliefconductorwidth=0.254 reliefentries=4 polygonreliefangle="90 Angle" airgapwidth=0.254
PolygonConnect Polygon_F.Cu-Net-(Q4-D)-8_ConnectDirect [IsNamedPolygon('F.Cu-Net-(Q4-D)-8')] p302: connectstyle=Direct reliefconductorwidth=0.254 reliefentries=4 polygonreliefangle="90 Angle" airgapwidth=0.254
PolygonConnect "Polygon_F.Cu-/Gigabit Ethernet/MDI2+-1_ConnectDirect" [IsNamedPolygon('F.Cu-/Gigabit Ethernet/MDI2+-1')] p303: connectstyle=Direct reliefconductorwidth=0.254 reliefentries=4 polygonreliefangle="90 Angle" airgapwidth=0.254
PolygonConnect Polygon_F.Cu-/~{PWR_LED}{slash}~{PSON}-5_ConnectDirect [IsNamedPolygon('F.Cu-/~{PWR_LED}{slash}~{PSON}-5')] p304: connectstyle=Direct reliefconductorwidth=0.254 reliefentries=4 polygonreliefangle="90 Angle" airgapwidth=0.254
PolygonConnect Polygon_F.Cu-+3V3-77_ConnectDirect [IsNamedPolygon('F.Cu-+3V3-77')] p305: connectstyle=Direct reliefconductorwidth=0.254 reliefentries=4 polygonreliefangle="90 Angle" airgapwidth=0.254
PolygonConnect Polygon_F.Cu-+5V-12_ConnectDirect [IsNamedPolygon('F.Cu-+5V-12')] p306: connectstyle=Direct reliefconductorwidth=0.254 reliefentries=4 polygonreliefangle="90 Angle" airgapwidth=0.254
PolygonConnect Polygon_F.Cu-/GPIO/SOC_UART2_TX-3_ConnectDirect [IsNamedPolygon('F.Cu-/GPIO/SOC_UART2_TX-3')] p307: connectstyle=Direct reliefconductorwidth=0.254 reliefentries=4 polygonreliefangle="90 Angle" airgapwidth=0.254
PolygonConnect Polygon_F.Cu-+3V3-76_ConnectDirect [IsNamedPolygon('F.Cu-+3V3-76')] p308: connectstyle=Direct reliefconductorwidth=0.254 reliefentries=4 polygonreliefangle="90 Angle" airgapwidth=0.254
PolygonConnect Polygon_F.Cu-+3V3-75_ConnectDirect [IsNamedPolygon('F.Cu-+3V3-75')] p309: connectstyle=Direct reliefconductorwidth=0.254 reliefentries=4 polygonreliefangle="90 Angle" airgapwidth=0.254
PolygonConnect Polygon_F.Cu-GND-184_ConnectDirect [IsNamedPolygon('F.Cu-GND-184')] p310: connectstyle=Direct reliefconductorwidth=0.254 reliefentries=4 polygonreliefangle="90 Angle" airgapwidth=0.254
PolygonConnect Polygon_F.Cu-VPullup-7_ConnectDirect [IsNamedPolygon('F.Cu-VPullup-7')] p311: connectstyle=Direct reliefconductorwidth=0.254 reliefentries=4 polygonreliefangle="90 Angle" airgapwidth=0.254
PolygonConnect Polygon_F.Cu-/USB2.0&USB3.0/CON_USB3_SSRX_N-4_ConnectDirect [IsNamedPolygon('F.Cu-/USB2.0&USB3.0/CON_USB3_SSRX_N-4')] p312: connectstyle=Direct reliefconductorwidth=0.254 reliefentries=4 polygonreliefangle="90 Angle" airgapwidth=0.254
PolygonConnect Polygon_F.Cu-GND-183_ConnectDirect [IsNamedPolygon('F.Cu-GND-183')] p313: connectstyle=Direct reliefconductorwidth=0.254 reliefentries=4 polygonreliefangle="90 Angle" airgapwidth=0.254
PolygonConnect "Polygon_F.Cu-/Gigabit Ethernet/LED2_ACT_ConnectDirect" [IsNamedPolygon('F.Cu-/Gigabit Ethernet/LED2_ACT')] p314: connectstyle=Direct reliefconductorwidth=0.254 reliefentries=4 polygonreliefangle="90 Angle" airgapwidth=0.254
PolygonConnect Polygon_F.Cu-+3V3-74_ConnectDirect [IsNamedPolygon('F.Cu-+3V3-74')] p315: connectstyle=Direct reliefconductorwidth=0.254 reliefentries=4 polygonreliefangle="90 Angle" airgapwidth=0.254
PolygonConnect "Polygon_F.Cu-/LattePanda Module/REFCLK2--2_ConnectDirect" [IsNamedPolygon('F.Cu-/LattePanda Module/REFCLK2--2')] p316: connectstyle=Direct reliefconductorwidth=0.254 reliefentries=4 polygonreliefangle="90 Angle" airgapwidth=0.254
PolygonConnect Polygon_F.Cu-+12VA-1_ConnectDirect [IsNamedPolygon('F.Cu-+12VA-1')] p317: connectstyle=Direct reliefconductorwidth=0.254 reliefentries=4 polygonreliefangle="90 Angle" airgapwidth=0.254
PolygonConnect Polygon_F.Cu-GND-182_ConnectDirect [IsNamedPolygon('F.Cu-GND-182')] p318: connectstyle=Direct reliefconductorwidth=0.254 reliefentries=4 polygonreliefangle="90 Angle" airgapwidth=0.254
PolygonConnect Polygon_F.Cu-GND-181_ConnectDirect [IsNamedPolygon('F.Cu-GND-181')] p319: connectstyle=Direct reliefconductorwidth=0.254 reliefentries=4 polygonreliefangle="90 Angle" airgapwidth=0.254
PolygonConnect Polygon_F.Cu-Net-(D11-A2)-2_ConnectDirect [IsNamedPolygon('F.Cu-Net-(D11-A2)-2')] p320: connectstyle=Direct reliefconductorwidth=0.254 reliefentries=4 polygonreliefangle="90 Angle" airgapwidth=0.254
PolygonConnect Polygon_F.Cu-/USB2.0&USB3.0/CON_USB3_SSTX_N-5_ConnectDirect [IsNamedPolygon('F.Cu-/USB2.0&USB3.0/CON_USB3_SSTX_N-5')] p321: connectstyle=Direct reliefconductorwidth=0.254 reliefentries=4 polygonreliefangle="90 Angle" airgapwidth=0.254
PolygonConnect Polygon_F.Cu-GND-180_ConnectDirect [IsNamedPolygon('F.Cu-GND-180')] p322: connectstyle=Direct reliefconductorwidth=0.254 reliefentries=4 polygonreliefangle="90 Angle" airgapwidth=0.254
PolygonConnect Polygon_F.Cu-/HDMI/HPD-5_ConnectDirect [IsNamedPolygon('F.Cu-/HDMI/HPD-5')] p323: connectstyle=Direct reliefconductorwidth=0.254 reliefentries=4 polygonreliefangle="90 Angle" airgapwidth=0.254
PolygonConnect Polygon_F.Cu-/USB2.0&USB3.0/CON_USB3_D_N-4_ConnectDirect [IsNamedPolygon('F.Cu-/USB2.0&USB3.0/CON_USB3_D_N-4')] p324: connectstyle=Direct reliefconductorwidth=0.254 reliefentries=4 polygonreliefangle="90 Angle" airgapwidth=0.254
PolygonConnect "Polygon_F.Cu-/Gigabit Ethernet/GbE_PCIe_RX+-2_ConnectDirect" [IsNamedPolygon('F.Cu-/Gigabit Ethernet/GbE_PCIe_RX+-2')] p325: connectstyle=Direct reliefconductorwidth=0.254 reliefentries=4 polygonreliefangle="90 Angle" airgapwidth=0.254
PolygonConnect Polygon_F.Cu-GND-179_ConnectDirect [IsNamedPolygon('F.Cu-GND-179')] p326: connectstyle=Direct reliefconductorwidth=0.254 reliefentries=4 polygonreliefangle="90 Angle" airgapwidth=0.254
PolygonConnect "Polygon_F.Cu-/LattePanda Module/HSIO_1_TX--2_ConnectDirect" [IsNamedPolygon('F.Cu-/LattePanda Module/HSIO_1_TX--2')] p327: connectstyle=Direct reliefconductorwidth=0.254 reliefentries=4 polygonreliefangle="90 Angle" airgapwidth=0.254
PolygonConnect Polygon_F.Cu-/USB2.0&USB3.0/CON_USB3_SSTX_P-5_ConnectDirect [IsNamedPolygon('F.Cu-/USB2.0&USB3.0/CON_USB3_SSTX_P-5')] p328: connectstyle=Direct reliefconductorwidth=0.254 reliefentries=4 polygonreliefangle="90 Angle" airgapwidth=0.254
PolygonConnect Polygon_F.Cu-Net-(U14-VDD)-3_ConnectDirect [IsNamedPolygon('F.Cu-Net-(U14-VDD)-3')] p329: connectstyle=Direct reliefconductorwidth=0.254 reliefentries=4 polygonreliefangle="90 Angle" airgapwidth=0.254
PolygonConnect Polygon_F.Cu-/HDMI/TMDS_D0--7_ConnectDirect [IsNamedPolygon('F.Cu-/HDMI/TMDS_D0--7')] p330: connectstyle=Direct reliefconductorwidth=0.254 reliefentries=4 polygonreliefangle="90 Angle" airgapwidth=0.254
PolygonConnect Polygon_F.Cu-GND-178_ConnectDirect [IsNamedPolygon('F.Cu-GND-178')] p331: connectstyle=Direct reliefconductorwidth=0.254 reliefentries=4 polygonreliefangle="90 Angle" airgapwidth=0.254
PolygonConnect "Polygon_F.Cu-/LattePanda Module/HSIO_8_TX+-2_ConnectDirect" [IsNamedPolygon('F.Cu-/LattePanda Module/HSIO_8_TX+-2')] p332: connectstyle=Direct reliefconductorwidth=0.254 reliefentries=4 polygonreliefangle="90 Angle" airgapwidth=0.254
PolygonConnect Polygon_F.Cu-/HDMI/TMDS_CK--7_ConnectDirect [IsNamedPolygon('F.Cu-/HDMI/TMDS_CK--7')] p333: connectstyle=Direct reliefconductorwidth=0.254 reliefentries=4 polygonreliefangle="90 Angle" airgapwidth=0.254
PolygonConnect Polygon_F.Cu-GND-177_ConnectDirect [IsNamedPolygon('F.Cu-GND-177')] p334: connectstyle=Direct reliefconductorwidth=0.254 reliefentries=4 polygonreliefangle="90 Angle" airgapwidth=0.254
PolygonConnect Polygon_F.Cu-Net-(U13-REF)-3_ConnectDirect [IsNamedPolygon('F.Cu-Net-(U13-REF)-3')] p335: connectstyle=Direct reliefconductorwidth=0.254 reliefentries=4 polygonreliefangle="90 Angle" airgapwidth=0.254
PolygonConnect Polygon_F.Cu-Net-(U10-NC-Pad6)-1_ConnectDirect [IsNamedPolygon('F.Cu-Net-(U10-NC-Pad6)-1')] p336: connectstyle=Direct reliefconductorwidth=0.254 reliefentries=4 polygonreliefangle="90 Angle" airgapwidth=0.254
PolygonConnect Polygon_F.Cu-GND-176_ConnectDirect [IsNamedPolygon('F.Cu-GND-176')] p337: connectstyle=Direct reliefconductorwidth=0.254 reliefentries=4 polygonreliefangle="90 Angle" airgapwidth=0.254
PolygonConnect Polygon_F.Cu-+12V-10_ConnectDirect [IsNamedPolygon('F.Cu-+12V-10')] p338: connectstyle=Direct reliefconductorwidth=0.254 reliefentries=4 polygonreliefangle="90 Angle" airgapwidth=0.254
PolygonConnect Polygon_F.Cu-GND-175_ConnectDirect [IsNamedPolygon('F.Cu-GND-175')] p339: connectstyle=Direct reliefconductorwidth=0.254 reliefentries=4 polygonreliefangle="90 Angle" airgapwidth=0.254
PolygonConnect Polygon_F.Cu-/PSU/PWR_EN-9_ConnectDirect [IsNamedPolygon('F.Cu-/PSU/PWR_EN-9')] p340: connectstyle=Direct reliefconductorwidth=0.254 reliefentries=4 polygonreliefangle="90 Angle" airgapwidth=0.254
PolygonConnect Polygon_F.Cu-/HDMI/HPD-4_ConnectDirect [IsNamedPolygon('F.Cu-/HDMI/HPD-4')] p341: connectstyle=Direct reliefconductorwidth=0.254 reliefentries=4 polygonreliefangle="90 Angle" airgapwidth=0.254
PolygonConnect Polygon_F.Cu-/GPIO/SOC_UART2_RX-4_ConnectDirect [IsNamedPolygon('F.Cu-/GPIO/SOC_UART2_RX-4')] p342: connectstyle=Direct reliefconductorwidth=0.254 reliefentries=4 polygonreliefangle="90 Angle" airgapwidth=0.254
PolygonConnect Polygon_F.Cu-+12V-9_ConnectDirect [IsNamedPolygon('F.Cu-+12V-9')] p343: connectstyle=Direct reliefconductorwidth=0.254 reliefentries=4 polygonreliefangle="90 Angle" airgapwidth=0.254
PolygonConnect Polygon_F.Cu-/GPIO/SOC_UART2_TX-2_ConnectDirect [IsNamedPolygon('F.Cu-/GPIO/SOC_UART2_TX-2')] p344: connectstyle=Direct reliefconductorwidth=0.254 reliefentries=4 polygonreliefangle="90 Angle" airgapwidth=0.254
PolygonConnect Polygon_F.Cu-/GPIO/I2C5_SCL-3_ConnectDirect [IsNamedPolygon('F.Cu-/GPIO/I2C5_SCL-3')] p345: connectstyle=Direct reliefconductorwidth=0.254 reliefentries=4 polygonreliefangle="90 Angle" airgapwidth=0.254
PolygonConnect Polygon_F.Cu-VDC-3_ConnectDirect [IsNamedPolygon('F.Cu-VDC-3')] p346: connectstyle=Direct reliefconductorwidth=0.254 reliefentries=4 polygonreliefangle="90 Angle" airgapwidth=0.254
PolygonConnect Polygon_F.Cu-/USB2.0&USB3.0/CON_USB4_SSRX_P-4_ConnectDirect [IsNamedPolygon('F.Cu-/USB2.0&USB3.0/CON_USB4_SSRX_P-4')] p347: connectstyle=Direct reliefconductorwidth=0.254 reliefentries=4 polygonreliefangle="90 Angle" airgapwidth=0.254
PolygonConnect Polygon_F.Cu-Net-(U6-RSET)-1_ConnectDirect [IsNamedPolygon('F.Cu-Net-(U6-RSET)-1')] p348: connectstyle=Direct reliefconductorwidth=0.254 reliefentries=4 polygonreliefangle="90 Angle" airgapwidth=0.254
PolygonConnect "Polygon_F.Cu-/LattePanda Module/USB_2_P7--2_ConnectDirect" [IsNamedPolygon('F.Cu-/LattePanda Module/USB_2_P7--2')] p349: connectstyle=Direct reliefconductorwidth=0.254 reliefentries=4 polygonreliefangle="90 Angle" airgapwidth=0.254
PolygonConnect "Polygon_F.Cu-/LattePanda Module/HSIO_2_RX--2_ConnectDirect" [IsNamedPolygon('F.Cu-/LattePanda Module/HSIO_2_RX--2')] p350: connectstyle=Direct reliefconductorwidth=0.254 reliefentries=4 polygonreliefangle="90 Angle" airgapwidth=0.254
PolygonConnect Polygon_F.Cu-+3V3-73_ConnectDirect [IsNamedPolygon('F.Cu-+3V3-73')] p351: connectstyle=Direct reliefconductorwidth=0.254 reliefentries=4 polygonreliefangle="90 Angle" airgapwidth=0.254
PolygonConnect Polygon_F.Cu-/USB2.0&USB3.0/CON_USB4_SSTX_P-5_ConnectDirect [IsNamedPolygon('F.Cu-/USB2.0&USB3.0/CON_USB4_SSTX_P-5')] p352: connectstyle=Direct reliefconductorwidth=0.254 reliefentries=4 polygonreliefangle="90 Angle" airgapwidth=0.254
PolygonConnect Polygon_F.Cu-/USB2.0&USB3.0/CON_USB3_SSTX_N-4_ConnectDirect [IsNamedPolygon('F.Cu-/USB2.0&USB3.0/CON_USB3_SSTX_N-4')] p353: connectstyle=Direct reliefconductorwidth=0.254 reliefentries=4 polygonreliefangle="90 Angle" airgapwidth=0.254
PolygonConnect Polygon_F.Cu-/USB2.0&USB3.0/CON_USB2_D_N-4_ConnectDirect [IsNamedPolygon('F.Cu-/USB2.0&USB3.0/CON_USB2_D_N-4')] p354: connectstyle=Direct reliefconductorwidth=0.254 reliefentries=4 polygonreliefangle="90 Angle" airgapwidth=0.254
PolygonConnect Polygon_F.Cu-Net-(Q8-G)-3_ConnectDirect [IsNamedPolygon('F.Cu-Net-(Q8-G)-3')] p355: connectstyle=Direct reliefconductorwidth=0.254 reliefentries=4 polygonreliefangle="90 Angle" airgapwidth=0.254
PolygonConnect Polygon_F.Cu-/HDMI/DDI_B_DDC_SCL-2_ConnectDirect [IsNamedPolygon('F.Cu-/HDMI/DDI_B_DDC_SCL-2')] p356: connectstyle=Direct reliefconductorwidth=0.254 reliefentries=4 polygonreliefangle="90 Angle" airgapwidth=0.254
PolygonConnect Polygon_F.Cu-/HDMI/DDI_B_TX3+_ConnectDirect [IsNamedPolygon('F.Cu-/HDMI/DDI_B_TX3+')] p357: connectstyle=Direct reliefconductorwidth=0.254 reliefentries=4 polygonreliefangle="90 Angle" airgapwidth=0.254
PolygonConnect Polygon_F.Cu-/PSU/PWR_EN-8_ConnectDirect [IsNamedPolygon('F.Cu-/PSU/PWR_EN-8')] p358: connectstyle=Direct reliefconductorwidth=0.254 reliefentries=4 polygonreliefangle="90 Angle" airgapwidth=0.254
PolygonConnect Polygon_F.Cu-GND-174_ConnectDirect [IsNamedPolygon('F.Cu-GND-174')] p359: connectstyle=Direct reliefconductorwidth=0.254 reliefentries=4 polygonreliefangle="90 Angle" airgapwidth=0.254
PolygonConnect "Polygon_F.Cu-/Gigabit Ethernet/HSI+-1_ConnectDirect" [IsNamedPolygon('F.Cu-/Gigabit Ethernet/HSI+-1')] p360: connectstyle=Direct reliefconductorwidth=0.254 reliefentries=4 polygonreliefangle="90 Angle" airgapwidth=0.254
PolygonConnect Polygon_F.Cu-/PSU/CC2-5_ConnectDirect [IsNamedPolygon('F.Cu-/PSU/CC2-5')] p361: connectstyle=Direct reliefconductorwidth=0.254 reliefentries=4 polygonreliefangle="90 Angle" airgapwidth=0.254
PolygonConnect Polygon_F.Cu-+3V3-72_ConnectDirect [IsNamedPolygon('F.Cu-+3V3-72')] p362: connectstyle=Direct reliefconductorwidth=0.254 reliefentries=4 polygonreliefangle="90 Angle" airgapwidth=0.254
PolygonConnect Polygon_F.Cu-/~{PLT_RST}-8_ConnectDirect [IsNamedPolygon('F.Cu-/~{PLT_RST}-8')] p363: connectstyle=Direct reliefconductorwidth=0.254 reliefentries=4 polygonreliefangle="90 Angle" airgapwidth=0.254
PolygonConnect Polygon_F.Cu-/Fan_Temp/FAN_1_PWM-1_ConnectDirect [IsNamedPolygon('F.Cu-/Fan_Temp/FAN_1_PWM-1')] p364: connectstyle=Direct reliefconductorwidth=0.254 reliefentries=4 polygonreliefangle="90 Angle" airgapwidth=0.254
PolygonConnect Polygon_F.Cu-/USB2.0&USB3.0/CON_USB3_SSRX_N-3_ConnectDirect [IsNamedPolygon('F.Cu-/USB2.0&USB3.0/CON_USB3_SSRX_N-3')] p365: connectstyle=Direct reliefconductorwidth=0.254 reliefentries=4 polygonreliefangle="90 Angle" airgapwidth=0.254
PolygonConnect Polygon_F.Cu-/USB2.0&USB3.0/CON_USB3_SSTX_P-4_ConnectDirect [IsNamedPolygon('F.Cu-/USB2.0&USB3.0/CON_USB3_SSTX_P-4')] p366: connectstyle=Direct reliefconductorwidth=0.254 reliefentries=4 polygonreliefangle="90 Angle" airgapwidth=0.254
PolygonConnect "Polygon_F.Cu-/PCIe x4/PCIE30_TX3_N-1_ConnectDirect" [IsNamedPolygon('F.Cu-/PCIe x4/PCIE30_TX3_N-1')] p367: connectstyle=Direct reliefconductorwidth=0.254 reliefentries=4 polygonreliefangle="90 Angle" airgapwidth=0.254
PolygonConnect Polygon_F.Cu-+12V-8_ConnectDirect [IsNamedPolygon('F.Cu-+12V-8')] p368: connectstyle=Direct reliefconductorwidth=0.254 reliefentries=4 polygonreliefangle="90 Angle" airgapwidth=0.254
PolygonConnect Polygon_F.Cu-Net-(J6-PadL3)-1_ConnectDirect [IsNamedPolygon('F.Cu-Net-(J6-PadL3)-1')] p369: connectstyle=Direct reliefconductorwidth=0.254 reliefentries=4 polygonreliefangle="90 Angle" airgapwidth=0.254
PolygonConnect "Polygon_F.Cu-/PCIe x4/PCIE30_TX1_N-1_ConnectDirect" [IsNamedPolygon('F.Cu-/PCIe x4/PCIE30_TX1_N-1')] p370: connectstyle=Direct reliefconductorwidth=0.254 reliefentries=4 polygonreliefangle="90 Angle" airgapwidth=0.254
PolygonConnect Polygon_F.Cu-Net-(U13-K)-3_ConnectDirect [IsNamedPolygon('F.Cu-Net-(U13-K)-3')] p371: connectstyle=Direct reliefconductorwidth=0.254 reliefentries=4 polygonreliefangle="90 Angle" airgapwidth=0.254
PolygonConnect Polygon_F.Cu-VPullup-6_ConnectDirect [IsNamedPolygon('F.Cu-VPullup-6')] p372: connectstyle=Direct reliefconductorwidth=0.254 reliefentries=4 polygonreliefangle="90 Angle" airgapwidth=0.254
PolygonConnect Polygon_F.Cu-GND-173_ConnectDirect [IsNamedPolygon('F.Cu-GND-173')] p373: connectstyle=Direct reliefconductorwidth=0.254 reliefentries=4 polygonreliefangle="90 Angle" airgapwidth=0.254
PolygonConnect Polygon_F.Cu-/GPIO/SOC_UART0_TX-3_ConnectDirect [IsNamedPolygon('F.Cu-/GPIO/SOC_UART0_TX-3')] p374: connectstyle=Direct reliefconductorwidth=0.254 reliefentries=4 polygonreliefangle="90 Angle" airgapwidth=0.254
PolygonConnect "Polygon_F.Cu-/LattePanda Module/HSIO_3_TX+-1_ConnectDirect" [IsNamedPolygon('F.Cu-/LattePanda Module/HSIO_3_TX+-1')] p375: connectstyle=Direct reliefconductorwidth=0.254 reliefentries=4 polygonreliefangle="90 Angle" airgapwidth=0.254
PolygonConnect Polygon_F.Cu-GND-172_ConnectDirect [IsNamedPolygon('F.Cu-GND-172')] p376: connectstyle=Direct reliefconductorwidth=0.254 reliefentries=4 polygonreliefangle="90 Angle" airgapwidth=0.254
PolygonConnect Polygon_F.Cu-/GPIO/I2C5_SDA-2_ConnectDirect [IsNamedPolygon('F.Cu-/GPIO/I2C5_SDA-2')] p377: connectstyle=Direct reliefconductorwidth=0.254 reliefentries=4 polygonreliefangle="90 Angle" airgapwidth=0.254
PolygonConnect Polygon_F.Cu-GND-171_ConnectDirect [IsNamedPolygon('F.Cu-GND-171')] p378: connectstyle=Direct reliefconductorwidth=0.254 reliefentries=4 polygonreliefangle="90 Angle" airgapwidth=0.254
PolygonConnect Polygon_F.Cu-/USB2.0&USB3.0/CON_USB3_D_N-3_ConnectDirect [IsNamedPolygon('F.Cu-/USB2.0&USB3.0/CON_USB3_D_N-3')] p379: connectstyle=Direct reliefconductorwidth=0.254 reliefentries=4 polygonreliefangle="90 Angle" airgapwidth=0.254
PolygonConnect Polygon_F.Cu-GND-170_ConnectDirect [IsNamedPolygon('F.Cu-GND-170')] p380: connectstyle=Direct reliefconductorwidth=0.254 reliefentries=4 polygonreliefangle="90 Angle" airgapwidth=0.254
PolygonConnect Polygon_F.Cu-Net-(J4B-VBUS2)_ConnectDirect [IsNamedPolygon('F.Cu-Net-(J4B-VBUS2)')] p381: connectstyle=Direct reliefconductorwidth=0.254 reliefentries=4 polygonreliefangle="90 Angle" airgapwidth=0.254
PolygonConnect "Polygon_F.Cu-/LattePanda Module/HSIO_3_TX--2_ConnectDirect" [IsNamedPolygon('F.Cu-/LattePanda Module/HSIO_3_TX--2')] p382: connectstyle=Direct reliefconductorwidth=0.254 reliefentries=4 polygonreliefangle="90 Angle" airgapwidth=0.254
PolygonConnect Polygon_F.Cu-/HDMI/TMDS_D1--7_ConnectDirect [IsNamedPolygon('F.Cu-/HDMI/TMDS_D1--7')] p383: connectstyle=Direct reliefconductorwidth=0.254 reliefentries=4 polygonreliefangle="90 Angle" airgapwidth=0.254
PolygonConnect Polygon_F.Cu-/USB2.0&USB3.0/CON_USB2_D_N-3_ConnectDirect [IsNamedPolygon('F.Cu-/USB2.0&USB3.0/CON_USB2_D_N-3')] p384: connectstyle=Direct reliefconductorwidth=0.254 reliefentries=4 polygonreliefangle="90 Angle" airgapwidth=0.254
PolygonConnect Polygon_F.Cu-GND-169_ConnectDirect [IsNamedPolygon('F.Cu-GND-169')] p385: connectstyle=Direct reliefconductorwidth=0.254 reliefentries=4 polygonreliefangle="90 Angle" airgapwidth=0.254
PolygonConnect Polygon_F.Cu-Net-(D22-K)-1_ConnectDirect [IsNamedPolygon('F.Cu-Net-(D22-K)-1')] p386: connectstyle=Direct reliefconductorwidth=0.254 reliefentries=4 polygonreliefangle="90 Angle" airgapwidth=0.254
PolygonConnect Polygon_F.Cu-GND-168_ConnectDirect [IsNamedPolygon('F.Cu-GND-168')] p387: connectstyle=Direct reliefconductorwidth=0.254 reliefentries=4 polygonreliefangle="90 Angle" airgapwidth=0.254
PolygonConnect Polygon_F.Cu-/USB2.0&USB3.0/CON_USB4_SSTX_P-4_ConnectDirect [IsNamedPolygon('F.Cu-/USB2.0&USB3.0/CON_USB4_SSTX_P-4')] p388: connectstyle=Direct reliefconductorwidth=0.254 reliefentries=4 polygonreliefangle="90 Angle" airgapwidth=0.254
PolygonConnect Polygon_F.Cu-GND-167_ConnectDirect [IsNamedPolygon('F.Cu-GND-167')] p389: connectstyle=Direct reliefconductorwidth=0.254 reliefentries=4 polygonreliefangle="90 Angle" airgapwidth=0.254
PolygonConnect Polygon_F.Cu-+3V3-71_ConnectDirect [IsNamedPolygon('F.Cu-+3V3-71')] p390: connectstyle=Direct reliefconductorwidth=0.254 reliefentries=4 polygonreliefangle="90 Angle" airgapwidth=0.254
PolygonConnect Polygon_F.Cu-Net-(D10-A2)-4_ConnectDirect [IsNamedPolygon('F.Cu-Net-(D10-A2)-4')] p391: connectstyle=Direct reliefconductorwidth=0.254 reliefentries=4 polygonreliefangle="90 Angle" airgapwidth=0.254
PolygonConnect Polygon_F.Cu-+3V3-70_ConnectDirect [IsNamedPolygon('F.Cu-+3V3-70')] p392: connectstyle=Direct reliefconductorwidth=0.254 reliefentries=4 polygonreliefangle="90 Angle" airgapwidth=0.254
PolygonConnect Polygon_F.Cu-GND-166_ConnectDirect [IsNamedPolygon('F.Cu-GND-166')] p393: connectstyle=Direct reliefconductorwidth=0.254 reliefentries=4 polygonreliefangle="90 Angle" airgapwidth=0.254
PolygonConnect Polygon_F.Cu-GND-165_ConnectDirect [IsNamedPolygon('F.Cu-GND-165')] p394: connectstyle=Direct reliefconductorwidth=0.254 reliefentries=4 polygonreliefangle="90 Angle" airgapwidth=0.254
PolygonConnect "Polygon_F.Cu-/M.2 E&M Key/~{CLKREQM}-1_ConnectDirect" [IsNamedPolygon('F.Cu-/M.2 E&M Key/~{CLKREQM}-1')] p395: connectstyle=Direct reliefconductorwidth=0.254 reliefentries=4 polygonreliefangle="90 Angle" airgapwidth=0.254
PolygonConnect Polygon_F.Cu-5V_HDMI_VCC-1_ConnectDirect [IsNamedPolygon('F.Cu-5V_HDMI_VCC-1')] p396: connectstyle=Direct reliefconductorwidth=0.254 reliefentries=4 polygonreliefangle="90 Angle" airgapwidth=0.254
PolygonConnect Polygon_F.Cu-Net-(U16-FB)-2_ConnectDirect [IsNamedPolygon('F.Cu-Net-(U16-FB)-2')] p397: connectstyle=Direct reliefconductorwidth=0.254 reliefentries=4 polygonreliefangle="90 Angle" airgapwidth=0.254
PolygonConnect Polygon_F.Cu-Net-(A1-~{BIOS_SEL})-2_ConnectDirect [IsNamedPolygon('F.Cu-Net-(A1-~{BIOS_SEL})-2')] p398: connectstyle=Direct reliefconductorwidth=0.254 reliefentries=4 polygonreliefangle="90 Angle" airgapwidth=0.254
PolygonConnect Polygon_F.Cu-/HDMI/DDI_B_HPD-4_ConnectDirect [IsNamedPolygon('F.Cu-/HDMI/DDI_B_HPD-4')] p399: connectstyle=Direct reliefconductorwidth=0.254 reliefentries=4 polygonreliefangle="90 Angle" airgapwidth=0.254
PolygonConnect Polygon_F.Cu-Net-(J5-VBUS2)-1_ConnectDirect [IsNamedPolygon('F.Cu-Net-(J5-VBUS2)-1')] p400: connectstyle=Direct reliefconductorwidth=0.254 reliefentries=4 polygonreliefangle="90 Angle" airgapwidth=0.254
PolygonConnect Polygon_F.Cu-/USB2.0&USB3.0/CON_USB3_SSTX_N-3_ConnectDirect [IsNamedPolygon('F.Cu-/USB2.0&USB3.0/CON_USB3_SSTX_N-3')] p401: connectstyle=Direct reliefconductorwidth=0.254 reliefentries=4 polygonreliefangle="90 Angle" airgapwidth=0.254
PolygonConnect Polygon_F.Cu-Net-(U12-NC-Pad6)-1_ConnectDirect [IsNamedPolygon('F.Cu-Net-(U12-NC-Pad6)-1')] p402: connectstyle=Direct reliefconductorwidth=0.254 reliefentries=4 polygonreliefangle="90 Angle" airgapwidth=0.254
PolygonConnect Polygon_F.Cu-/~{WAKE}-8_ConnectDirect [IsNamedPolygon('F.Cu-/~{WAKE}-8')] p403: connectstyle=Direct reliefconductorwidth=0.254 reliefentries=4 polygonreliefangle="90 Angle" airgapwidth=0.254
PolygonConnect Polygon_F.Cu-/~{WAKE}-7_ConnectDirect [IsNamedPolygon('F.Cu-/~{WAKE}-7')] p404: connectstyle=Direct reliefconductorwidth=0.254 reliefentries=4 polygonreliefangle="90 Angle" airgapwidth=0.254
PolygonConnect Polygon_F.Cu-+5V-11_ConnectDirect [IsNamedPolygon('F.Cu-+5V-11')] p405: connectstyle=Direct reliefconductorwidth=0.254 reliefentries=4 polygonreliefangle="90 Angle" airgapwidth=0.254
PolygonConnect Polygon_F.Cu-+3V3-69_ConnectDirect [IsNamedPolygon('F.Cu-+3V3-69')] p406: connectstyle=Direct reliefconductorwidth=0.254 reliefentries=4 polygonreliefangle="90 Angle" airgapwidth=0.254
PolygonConnect Polygon_F.Cu-/HDMI/TMDS_CK--6_ConnectDirect [IsNamedPolygon('F.Cu-/HDMI/TMDS_CK--6')] p407: connectstyle=Direct reliefconductorwidth=0.254 reliefentries=4 polygonreliefangle="90 Angle" airgapwidth=0.254
PolygonConnect Polygon_F.Cu-GND-164_ConnectDirect [IsNamedPolygon('F.Cu-GND-164')] p408: connectstyle=Direct reliefconductorwidth=0.254 reliefentries=4 polygonreliefangle="90 Angle" airgapwidth=0.254
PolygonConnect Polygon_F.Cu-GND-163_ConnectDirect [IsNamedPolygon('F.Cu-GND-163')] p409: connectstyle=Direct reliefconductorwidth=0.254 reliefentries=4 polygonreliefangle="90 Angle" airgapwidth=0.254
PolygonConnect Polygon_F.Cu-/HDMI/DDI_B_TX1-_ConnectDirect [IsNamedPolygon('F.Cu-/HDMI/DDI_B_TX1-')] p410: connectstyle=Direct reliefconductorwidth=0.254 reliefentries=4 polygonreliefangle="90 Angle" airgapwidth=0.254
PolygonConnect Polygon_F.Cu-/USB2.0&USB3.0/CON_USB2_D_P-3_ConnectDirect [IsNamedPolygon('F.Cu-/USB2.0&USB3.0/CON_USB2_D_P-3')] p411: connectstyle=Direct reliefconductorwidth=0.254 reliefentries=4 polygonreliefangle="90 Angle" airgapwidth=0.254
PolygonConnect Polygon_F.Cu-/HDMI/TMDS_D2--7_ConnectDirect [IsNamedPolygon('F.Cu-/HDMI/TMDS_D2--7')] p412: connectstyle=Direct reliefconductorwidth=0.254 reliefentries=4 polygonreliefangle="90 Angle" airgapwidth=0.254
PolygonConnect Polygon_F.Cu-Net-(Q8-G)-2_ConnectDirect [IsNamedPolygon('F.Cu-Net-(Q8-G)-2')] p413: connectstyle=Direct reliefconductorwidth=0.254 reliefentries=4 polygonreliefangle="90 Angle" airgapwidth=0.254
PolygonConnect Polygon_F.Cu-/GPIO/SOC_UART0_RX-4_ConnectDirect [IsNamedPolygon('F.Cu-/GPIO/SOC_UART0_RX-4')] p414: connectstyle=Direct reliefconductorwidth=0.254 reliefentries=4 polygonreliefangle="90 Angle" airgapwidth=0.254
PolygonConnect Polygon_F.Cu-/GPIO/I2C4_SDA-2_ConnectDirect [IsNamedPolygon('F.Cu-/GPIO/I2C4_SDA-2')] p415: connectstyle=Direct reliefconductorwidth=0.254 reliefentries=4 polygonreliefangle="90 Angle" airgapwidth=0.254
PolygonConnect Polygon_F.Cu-/GPIO/I2C4_SDA-1_ConnectDirect [IsNamedPolygon('F.Cu-/GPIO/I2C4_SDA-1')] p416: connectstyle=Direct reliefconductorwidth=0.254 reliefentries=4 polygonreliefangle="90 Angle" airgapwidth=0.254
PolygonConnect Polygon_F.Cu-Net-(J16-~{W_DISABLE1})-1_ConnectDirect [IsNamedPolygon('F.Cu-Net-(J16-~{W_DISABLE1})-1')] p417: connectstyle=Direct reliefconductorwidth=0.254 reliefentries=4 polygonreliefangle="90 Angle" airgapwidth=0.254
PolygonConnect Polygon_F.Cu-Net-(U6-CKXTAL2)-5_ConnectDirect [IsNamedPolygon('F.Cu-Net-(U6-CKXTAL2)-5')] p418: connectstyle=Direct reliefconductorwidth=0.254 reliefentries=4 polygonreliefangle="90 Angle" airgapwidth=0.254
PolygonConnect Polygon_F.Cu-GND-162_ConnectDirect [IsNamedPolygon('F.Cu-GND-162')] p419: connectstyle=Direct reliefconductorwidth=0.254 reliefentries=4 polygonreliefangle="90 Angle" airgapwidth=0.254